# EAGLE board sma-to-bnc-feedthrough-v2 (EAGLE 9.6.1)
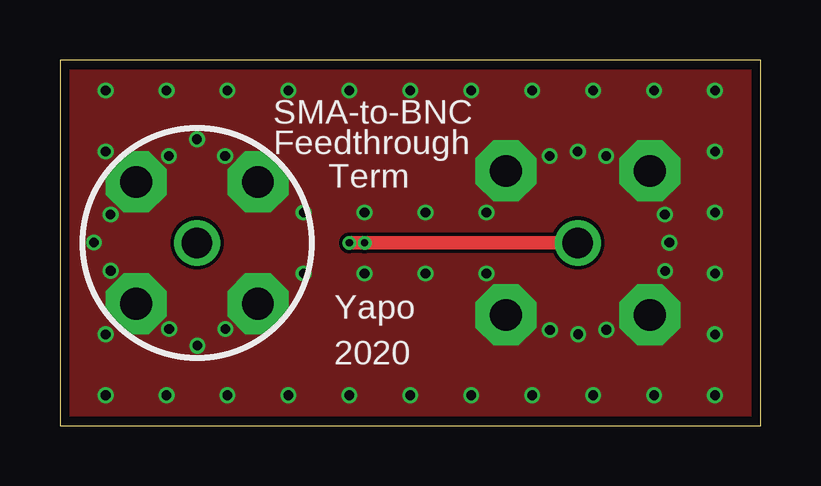
[diagram p0: board, top side]
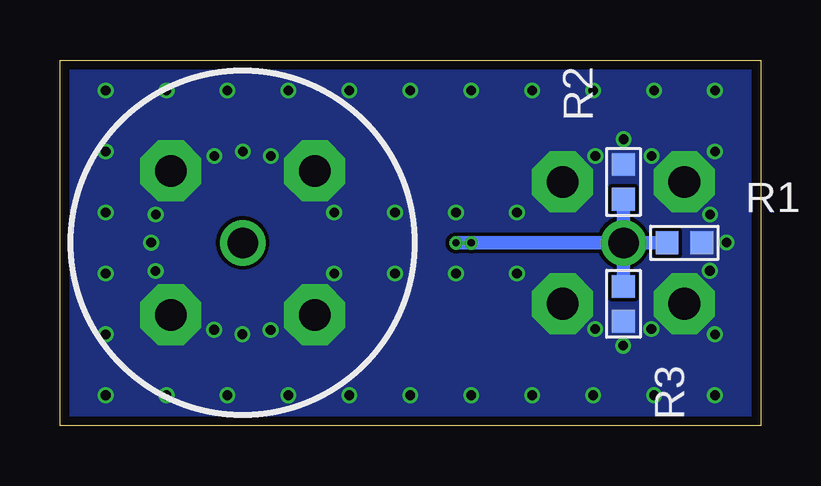
[diagram p1: board, bottom side, seen from below]

Size 29.21 x 15.24 mm. Coordinates in mm from the lower left corner, seen from the top.
Outline: 0,0 29.21,0 29.21,15.24 0,15.24 0,0
Copper layers (1*16): Top 0.035559375mm / dielectric 1.6mm / Bottom 0.035559375mm
Design rules "oshpark-2layer *": minimum track width 6mil, minimum drill 10mil, track to track 6mil, track to pad 6mil, pad to pad 6mil, via to via 6mil, smd to smd 6mil, copper to edge 15mil, drill to drill 6mil, minimum pad ring 5mil, minimum via ring 5mil, stop-mask expansion 2.5mil, vias tented up to drill 20mil, thermal gap 10mil
Net classes: 1 22-6: width 0.559 mm, clearance 0.152 mm

## Footprints (pad centres in the part's own frame; a part is rotated, then mirrored left to right if it is on the bottom)
SMA_RA_PCB = drill 1.27 pad 1.778: CENTER 0,0 | drill 1.321 pad 2.54 octagon: SHIELD@1 -2.54,-2.54; SHIELD@2 -2.54,2.54; SHIELD@3 2.54,2.54; SHIELD@4 2.54,-2.54
BNC_MALE_PCB = drill 1.27 pad 1.676: CENTER 0,0 | drill 1.321 pad 2.54 octagon: SHIELD@1 -3,-3; SHIELD@2 -3,3; SHIELD@3 3,3; SHIELD@4 3,-3
R0603 = smd 0.95 x 0.95: P$1 -0.725,0; P$2 0.725,0

## Placement (x,y rotation side)
J1  SMA_FEMALE_RA  [SMA_RA_PCB]  5.71,7.62 0 bottom
J2  BNC-M  [BNC_MALE_PCB]  21.59,7.62 0 top
R1  150  [R0603]  3.17,7.62 0 bottom
R2  150  [R0603]  5.71,10.16 90 bottom
R3  150  [R0603]  5.71,5.08 270 bottom

## Library data of the parts
J1 J2 R1-R3 = yapo

## Nets
GND: J1.SHIELD@1 J1.SHIELD@2 J1.SHIELD@3 J1.SHIELD@4 J2.SHIELD@1 J2.SHIELD@2 J2.SHIELD@3 J2.SHIELD@4 R1.P$2 R2.P$2 R3.P$2
N$1 [22-6]: J1.CENTER J2.CENTER R1.P$1 R2.P$1 R3.P$1

## Tracks (layer width: path | path; a pad name or v marks a point on that pad's centre or on a via)
GND  (via drill 0.4)
  other vias: 10.16,8.89 10.16,6.35 15.24,8.89 15.24,6.35 17.78,8.89 17.78,6.35 5.71,11.94 6.89,11.25 6.9,4.03 5.73,3.34 4.55,4.03 2.12,6.46 1.42,7.63 2.11,8.8 4.54,11.24 1.91,1.27 4.45,1.27 6.99,1.27 9.53,1.27 14.61,1.27 17.14,1.27 19.68,1.27 22.23,1.27 24.77,1.27 27.3,1.27 1.91,13.97 4.45,13.97 6.99,13.97 9.53,13.97 14.61,13.97 17.14,13.97 19.68,13.97 22.23,13.97 24.77,13.97 27.3,13.97 1.91,11.43 1.91,3.81 27.3,11.43 27.3,3.81 27.3,6.35 27.3,8.89 12.7,8.89 12.7,6.35 21.59,11.43 22.77,11.25 25.22,8.81 25.41,7.63 25.22,6.45 22.78,4 21.61,3.81 20.43,4 20.41,11.24 12.06,13.97 12.06,1.27
  pour Top (no thermals): -2.54,17.78 31.11,17.78 31.11,-2.54 -2.54,-2.54
  pour Bottom (no thermals): 30.48,20.32 30.48,-4.45 -4.45,-4.45 -4.45,20.32
N$1  (via drill 0.3 pad 0.56)
  Top 0.559: J2.CENTER v12.7,7.62 v12.06,7.62
  Bottom 0.559: J1.CENTER v12.7,7.62 | R2.P$1 J1.CENTER | R1.P$1 J1.CENTER | R3.P$1 J1.CENTER

## Text on the board
tPlace: SMA-to-BNC | Feedthrough | Term | Yapo | 2020